# EAGLE board Obstacle_Avoiding_RC_Car (EAGLE 9.7.0)

Size 372.57 x 158.88 mm. Coordinates in mm from the lower left corner, seen from the top.
Outline: 0,0 372.56,0 372.56,158.88 0,158.88 0,0
Copper layers (1*16): Top 0.035mm / dielectric 1.5mm / Bottom 0.035mm
Design rules "default": minimum track width 6mil, minimum drill 0.35mm, track to track 6mil, track to pad 6mil, pad to pad 6mil, via to via 6mil, smd to smd 6mil, copper to edge 40mil, drill to drill 6mil, minimum pad ring 10mil, minimum via ring 8mil, stop-mask expansion 4mil, vias tented up to drill 0mil, thermal gap 10mil

## Footprints (pad centres in the part's own frame; a part is rotated, then mirrored left to right if it is on the bottom)
BATTERY-GENERIC = drill 1.118 pad 3.15 octagon: + 2.54,0; - -2.54,0
DG01D = drill 1.118 pad 3.15 octagon: + 2.54,0; - -2.54,0
28015 = drill 1.016 long: 1 -2.54,0; 2 0,0; 3 2.54,0
DIP762W53P254L1969H508Q16B = drill 0.743 pad 1.343: 1 -3.81,8.89; 2 -3.81,6.35; 3 -3.81,3.81; 4 -3.81,1.27; 5 -3.81,-1.27; 6 -3.81,-3.81; 7 -3.81,-6.35; 8 -3.81,-8.89; 9 3.81,-8.89; 10 3.81,-6.35; 11 3.81,-3.81; 12 3.81,-1.27; 13 3.81,1.27; 14 3.81,3.81; 15 3.81,6.35; 16 3.81,8.89
ARDUINO-UNO-R3-SHIELD = drill 1.016 pad 1.88: 3.3V 24.13,-2.54; 5V 24.13,0; A0 24.13,12.7; A1 24.13,15.24; A2 24.13,17.78; A3 24.13,20.32; A4 24.13,22.86; A5 24.13,25.4; AREF -24.13,-13.97; D2 -24.13,20.32; D3 -24.13,17.78; D4 -24.13,15.24; D5 -24.13,12.7; D6 -24.13,10.16; D7 -24.13,7.62; D8 -24.13,3.81; D9 -24.13,1.27; D10 -24.13,-1.27; D11 -24.13,-3.81; D12 -24.13,-6.35; D13 -24.13,-8.89; GND@0 24.13,2.54; GND@1 24.13,5.08; GND@2 -24.13,-11.43; IOREF 24.13,-7.62; NC 24.13,-10.16; RES 24.13,-5.08; RX -24.13,25.4; SCL -24.13,-19.05; SDA -24.13,-16.51; TX -24.13,22.86; VIN 24.13,7.62

## Placement (x,y rotation side)
BAT1  6V  [BATTERY-GENERIC]  271.08,20.64 0 top
M1  MOTOR_DG01D  [DG01D]  68.87,130.5 90 top
M2  MOTOR_DG01D  [DG01D]  75.7,12.82 90 top
M3  MOTOR_DG01D  [DG01D]  163.07,130.66 90 top
M4  MOTOR_DG01D  [DG01D]  167.79,12.7 90 top
PING1  DISTANCE-SENSOR-3PIN  [28015]  26.04,103.32 0 top
U1  L293E  [DIP762W53P254L1969H508Q16B]  96.73,62.45 90 top
U4  L293E  [DIP762W53P254L1969H508Q16B]  157.69,62.45 90 top
U5  ARDUINO-UNO-R3-SHIELD  [ARDUINO-UNO-R3-SHIELD]  338.05,129.04 270 top

## Library data of the parts
BAT1 M1-M4 PING1 U1 U4 U5 = Tinkercad

## Nets
BAT1+: BAT1.+ U1.8 U4.8
BAT1-: BAT1.- PING1.1 U1.4 U1.5 U1.12 U1.13 U4.4 U4.5 U4.12 U4.13 U5.GND@0 U5.GND@1 U5.GND@2
M1_+: M1.+ U1.14
M1_-: M1.- U1.11
M2_+: M2.+ U1.3
M2_-: M2.- U1.6
M3_+: M3.+ U4.14
M3_-: M3.- U4.11
M4_+: M4.+ U4.3
M4_-: M4.- U4.6
U5_5V: PING1.2 U1.16 U4.16 U5.5V
U5_D2: U1.2 U4.2 U5.D2
U5_D3: U1.7 U4.7 U5.D3
U5_D4: U1.15 U4.15 U5.D4
U5_D5: U1.10 U4.10 U5.D5
U5_D6: U1.9 U4.9 U5.D6
U5_D10: U1.1 U4.1 U5.D10
U5_D11: PING1.3 U5.D11

## Tracks (layer width: path | path; a pad name or v marks a point on that pad's centre or on a via)
BAT1+  (2 unrouted)
BAT1-  (12 unrouted)
M1_+  (1 unrouted)
M1_-  (1 unrouted)
M2_+  (1 unrouted)
M2_-  (1 unrouted)
M3_+  (1 unrouted)
M3_-  (1 unrouted)
M4_+  (1 unrouted)
M4_-  (1 unrouted)
U5_5V  (3 unrouted)
U5_D2  (2 unrouted)
U5_D3  (2 unrouted)
U5_D4  (2 unrouted)
U5_D5  (2 unrouted)
U5_D6  (2 unrouted)
U5_D10  (2 unrouted)
U5_D11  (1 unrouted)